# EAGLE board usbasp (EAGLE 4.16)
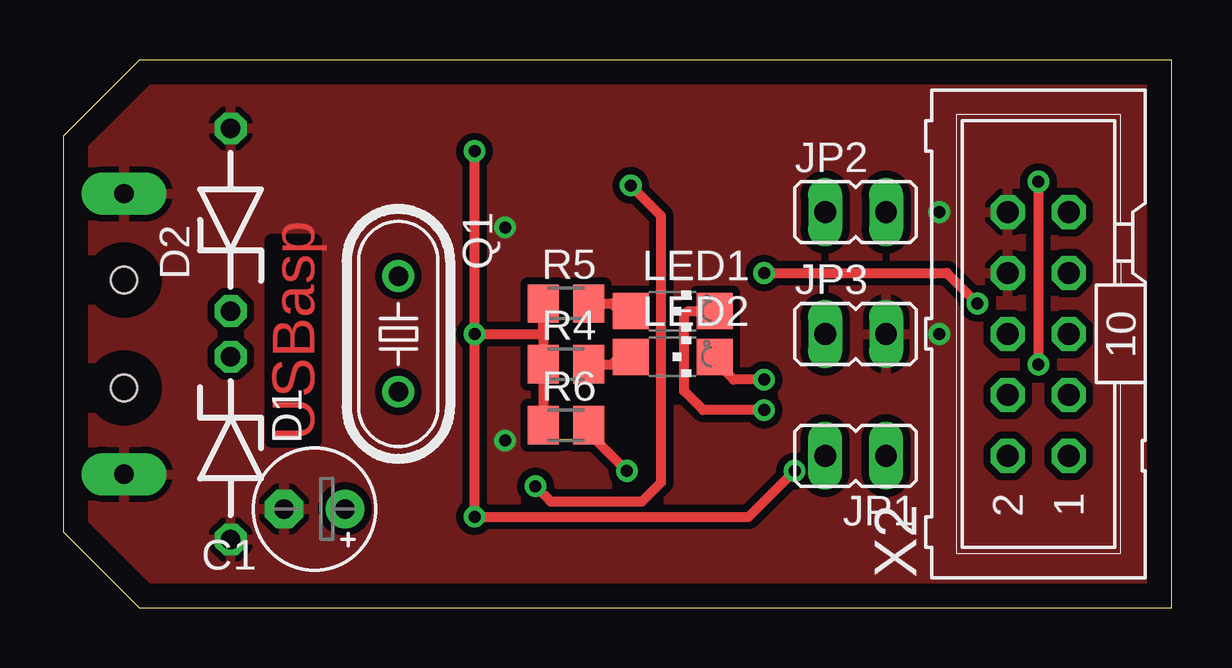
[diagram p0: board, top side]
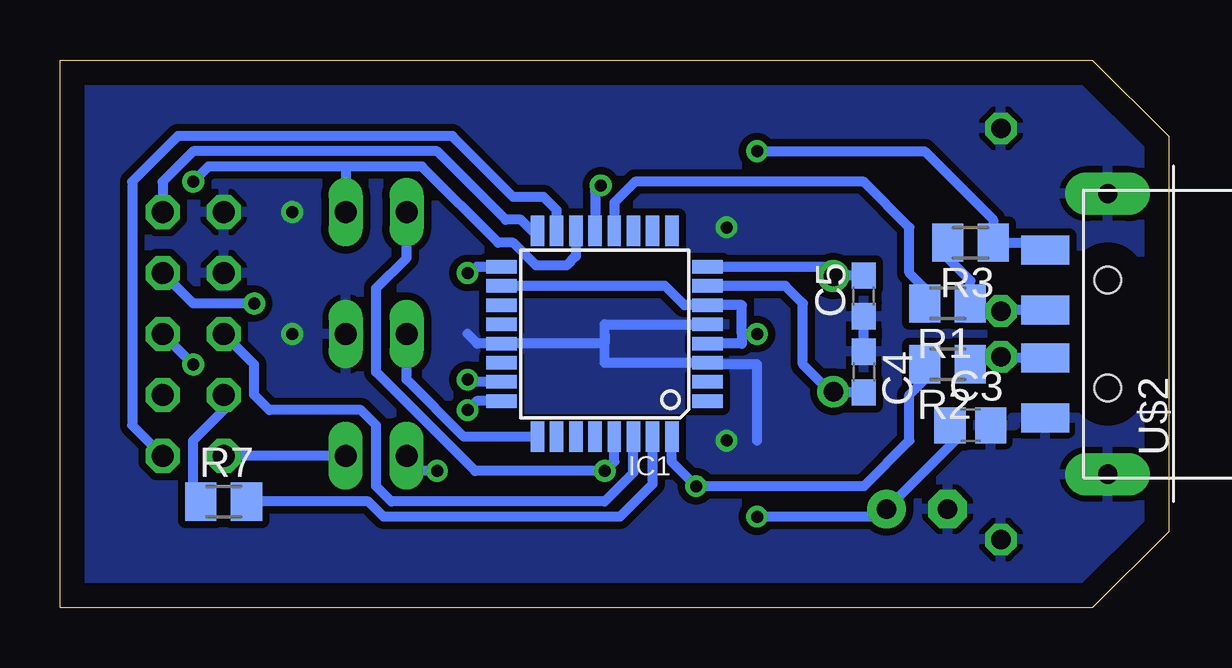
[diagram p1: board, bottom side, seen from below]

Size 46.19 x 22.85 mm. Coordinates in mm from the lower left corner, seen from the top.
Outline: 46.19,0 46.19,22.85 3.17,22.85 0,19.68 0,3.17 3.17,0 46.19,0
Copper layers (1*16): Top 0.035mm / dielectric 1.5mm / Bottom 0.035mm
Design rules "default": minimum track width 10mil, minimum drill 15mil, track to track 8mil, track to pad 8mil, pad to pad 8mil, via to via 8mil, smd to smd 8mil, copper to edge 40mil, drill to drill 8mil, minimum pad ring 10mil, minimum via ring 8mil, stop-mask expansion 4mil, vias tented up to drill 0mil, thermal gap 10mil
bRestrict: area 4.1,8.6 to 6.3,9.8; area 6.7,8.6 to 8.3,9.2

## Footprints (pad centres in the part's own frame; a part is rotated, then mirrored left to right if it is on the bottom)
E2,5-5 = drill 0.813 pad 1.6 round: + -1.27,0 | drill 0.813 pad 1.6 octagon: - 1.27,0
C0805 = smd 1.3 x 1.5: 1 -0.85,0; 2 0.85,0
C0603 = smd 1.1 x 1: 1 -0.85,0; 2 0.85,0
ZDIO-7.5 = drill 0.813 octagon: A 3.81,0; C -3.81,0
TQFP32-08 = smd 1.27 x 0.559: 1 -4.293,2.8; 2 -4.293,2; 3 -4.293,1.2; 4 -4.293,0.4; 5 -4.293,-0.4; 6 -4.293,-1.2; 7 -4.293,-2; 8 -4.293,-2.8; 17 4.293,-2.8; 18 4.293,-2; 19 4.293,-1.2; 20 4.293,-0.4; 21 4.293,0.4; 22 4.293,1.2; 23 4.293,2; 24 4.293,2.8 | smd 0.559 x 1.27: 9 -2.8,-4.293; 10 -2,-4.293; 11 -1.2,-4.293; 12 -0.4,-4.293; 13 0.4,-4.293; 14 1.2,-4.293; 15 2,-4.293; 16 2.8,-4.293; 25 2.8,4.293; 26 2,4.293; 27 1.2,4.293; 28 0.4,4.293; 29 -0.4,4.293; 30 -1.2,4.293; 31 -2,4.293; 32 -2.8,4.293
JP1 = drill 0.914 long: 1 0,-1.27; 2 0,1.27
CHIPLED_1206 = smd 1.5 x 1.5: A 0,-1.75; C 0,1.75
HC49/S = drill 0.813 round: 1 -2.413,0; 2 2.413,0
M0805 = smd 1.3 x 1.6: 1 -0.95,0; 2 0.95,0
USB-MOLEX = smd 1.2 x 2: 1 3.5,2.6; 2 1,2.6; 3 -1,2.6; 4 -3.5,2.6 | drill 0.8 pad 1.778 long: 5 5.85,0; 6 -5.85,0 | hole 1.1: -2.25,0; 2.25,0
ML10 = drill 0.914 octagon: 1 -5.08,-1.27; 2 -5.08,1.27; 3 -2.54,-1.27; 4 -2.54,1.27; 5 0,-1.27; 6 0,1.27; 7 2.54,-1.27; 8 2.54,1.27; 9 5.08,-1.27; 10 5.08,1.27

## Placement (x,y rotation side)
C1  4u7  [E2,5-5]  10.48,4.12 180 top
C3  100n  [C0805]  8.26,7.61 0 bottom
C4  22p  [C0603]  12.7,9.84 270 bottom
C5  22p  [C0603]  12.7,13.01 90 bottom
D1  3V6  [ZDIO-7.5]  6.98,6.66 270 top
D2  3V6  [ZDIO-7.5]  6.98,16.19 90 top
IC1  MEGA8-AI  [TQFP32-08]  23.5,11.43 180 bottom
JP1  Supply target  [JP1]  33.02,6.34 90 top
JP2  Self programming  [JP1]  33.02,16.5 270 top
JP3  Slow SCK  [JP1]  33.02,11.43 270 top
LED1  green  [CHIPLED_1206]  25.4,12.38 270 top
LED2  red  [CHIPLED_1206]  25.4,10.47 270 top
Q1  12MHz  [HC49/S]  13.97,11.43 270 top
R1  68  [M0805]  9.21,12.7 180 bottom
R2  68  [M0805]  9.21,10.16 180 bottom
R3  2k2  [M0805]  8.26,15.24 180 bottom
R4  1k  [M0805]  20.96,10.16 0 top
R5  1k  [M0805]  20.96,12.7 0 top
R6  10k  [M0805]  20.96,7.61 0 top
R7  1k  [M0805]  39.37,4.44 0 bottom
U$2  USB-MOLEX  [USB-MOLEX]  2.54,11.43 90 bottom
X2  [ML10]  40.64,11.43 90 top

## Library data of the parts
C1 C3-C5 R1-R7 = rcl
D1 D2 = diode
IC1 = atmel
JP1-JP3 = jumper
LED1 LED2 = led
Q1 = crystal
U$2 = usb
X2 = con-harting-ml

## Nets
+5V: C1.+ C3.1 IC1.4 IC1.6 IC1.18 JP1.2 R3.1 R4.1 R5.1 R6.1 U$2.1
GND: C1.- C3.2 C4.1 C5.1 D1.A D2.A IC1.3 IC1.5 IC1.21 JP3.2 U$2.4 U$2.5 U$2.6 X2.8 X2.10
N$1: IC1.29 JP2.1 R6.2
N$2: IC1.14 JP2.2 X2.5
N$3: IC1.15 X2.1
N$4: IC1.17 X2.7
N$6: IC1.16 X2.9
N$7: IC1.13 IC1.32 R2.2
N$9: IC1.31 R7.2
N$10: R7.1 X2.4
N$11: IC1.30 X2.6
N$12: IC1.25 JP3.1
N$13: LED2.A R4.2
N$14: IC1.23 LED2.C
N$15: IC1.24 LED1.C
N$16: IC1.12 R1.2
N$17: D2.C R1.1 R3.2 U$2.2
N$18: D1.C R2.1 U$2.3
N$22: C4.2 IC1.7 Q1.2
N$23: C5.2 IC1.8 Q1.1
N$25: LED1.A R5.2
VCCINT: JP1.1 X2.2

## Tracks (layer width: path | path; a pad name or v marks a point on that pad's centre or on a via)
+5V  (via drill 0.5)
  Top 0.406: 20.01,11.43 R4.1 20.32,10.16 20.01,9.84 R6.1 | 20.01,11.43 R5.1 | v17.15,11.43 20.01,11.43 | v17.15,11.43 v17.15,3.8 28.58,3.8 v30.48,5.71 | v17.15,11.43 v17.15,19.05
  Bottom 0.406: IC1.4 17.78,11.03 17.78,11.43 | 17.78,11.43 17.78,12.62 IC1.6 20.18,12.62 20.98,13.43 IC1.18 | 9.53,7.61 C3.1 9.11,7.4 9.21,7.3 8.89,6.98 C1.+ 12.06,3.8 v17.15,3.8 | v17.15,11.43 17.78,11.43 | JP1.2 31.12,5.71 v30.48,5.71 | v17.15,19.05 10.16,19.05 7.3,16.19 R3.1 5.08,15.24 5.14,15.18 U$2.1
GND  (via drill 0.5)
  Bottom 0.406: IC1.5 23.5,11.83 23.5,11.43 | 23.5,11.43 23.5,11.03 IC1.21 28.81,11.03 29.21,11.43 | 23.5,11.43 23.5,10.23 IC1.3 19.2,10.16 17.15,10.16 17.15,6.98 | C4.1 C5.1
  other vias: 18.42,15.87 18.42,6.98 36.51,16.5 36.51,11.43
  pour Bottom (isolate 0.305): -0.95,23.49 -0.95,-0.64 47.31,-0.64 47.31,23.49
  pour Top (isolate 0.305): -0.95,23.49 -0.95,-0.64 47.31,-0.64 47.31,23.49
N$1  (via drill 0.5)
  Top 0.406: R6.2 21.91,7.3 v23.5,5.71
  Bottom 0.406: JP2.1 31.75,14.6 33.02,13.33 33.02,9.84 28.89,5.71 v23.5,5.71 23.1,6.11 IC1.29
N$2  (via drill 0.5)
  Top 0.406: v40.64,17.78 v40.64,10.16
  Bottom 0.406: IC1.14 24.7,14.67 25.08,14.28 26.35,14.28 27.31,15.24 27.94,15.24 31.12,18.41 34.29,18.41 | 34.29,18.41 JP2.2 | 34.29,18.41 40,18.41 v40.64,17.78 | v40.64,10.16 X2.5
N$3
  Bottom 0.406: IC1.15 25.5,16.6 26.04,17.14 27.31,17.14 29.85,19.68 41.27,19.68 43.18,17.78 43.18,7.61 X2.1
N$4  (via drill 0.5)
  Top 0.406: v29.21,13.96 36.83,13.96 v38.1,12.7
  Bottom 0.406: IC1.17 28.84,14.23 v29.21,13.96 | X2.7 40.64,12.7 v38.1,12.7
N$6
  Bottom 0.406: IC1.16 26.52,15.72 26.99,16.19 27.62,16.19 30.48,19.05 40.64,19.05 41.91,17.78 X2.9
N$7  (via drill 0.5)
  Top 0.406: v23.65,17.62 24.92,16.35 24.92,5.23 24.13,4.44 20.32,4.44 v19.69,5.08
  Bottom 0.406: IC1.32 20.7,6.08 v19.69,5.08 12.7,5.08 10.79,6.98 10.79,8.88 10.16,9.52 R2.2 | IC1.13 23.9,17.38 v23.65,17.62
N$9
  Bottom 0.406: IC1.31 21.5,5.17 22.86,3.8 32.7,3.8 33.34,4.44 R7.2
N$10
  Bottom 0.406: X2.4 39.37,8.25 40.64,6.98 40.64,4.44 R7.1
N$11
  Bottom 0.406: IC1.30 22.3,5.64 23.5,4.44 32.38,4.44 33.02,5.08 33.02,7.61 33.66,8.25 37.46,8.25 38.1,8.88 38.1,10.16 X2.6
N$12
  Bottom 0.406: 26.3,6.98 IC1.25 29.36,7.13 31.75,9.52 JP3.1
N$13
  Top 0.406: LED2.A 23.65,10.63 23.5,10.79 22.86,10.16 R4.2
N$14  (via drill 0.5)
  Top 0.406: LED2.C 27.15,10.31 27.94,9.52 v29.21,9.52
  Bottom 0.406: IC1.23 29.12,9.43 v29.21,9.52
N$15  (via drill 0.5)
  Top 0.406: LED1.C 26.04,12.38 25.88,12.22 25.88,9.04 26.67,8.25 v29.21,8.25
  Bottom 0.406: IC1.24 28.84,8.62 v29.21,8.25
N$16
  Bottom 0.406: IC1.12 23.1,16.91 22.23,17.78 12.7,17.78 10.79,15.87 10.79,13.96 10.16,13.33 R1.2
N$17
  Bottom 0.406: 8.89,15.24 R3.2 9.21,14.6 8.26,13.65 R1.1 8.26,12.38 D2.C 6.98,12.43 U$2.2
N$18
  Bottom 0.406: U$2.3 6.98,10.43 D1.C 8.26,10.47 R2.1
N$22
  Bottom 0.406: IC1.7 15.97,13.43 15.24,12.7 15.24,10.16 13.97,8.88 | 13.97,8.88 Q1.2 | C4.2 13.97,8.99 13.97,8.88
N$23
  Bottom 0.406: IC1.8 14.23,14.23 13.97,13.96 Q1.1 | Q1.1 13.97,13.65 | C5.2 13.97,13.86 Q1.1
N$25
  Top 0.406: LED1.A 23.65,12.21 23.5,12.06 22.86,12.7 R5.2
VCCINT
  Bottom 0.406: JP1.1 X2.2

## Text on the board
Top: USBasp